# Altium PCB CSD_25.PcbDoc
Units mm, origin at the board's own origin, x right, y up, seen from the top; angles counter-clockwise.
Board outline 92.5 x 90.5 mm, 2 copper layers (Top Layer, Bottom Layer), stack 1.671 mm thick; 24 components, 28 nets, 132 pads, 30 vias.
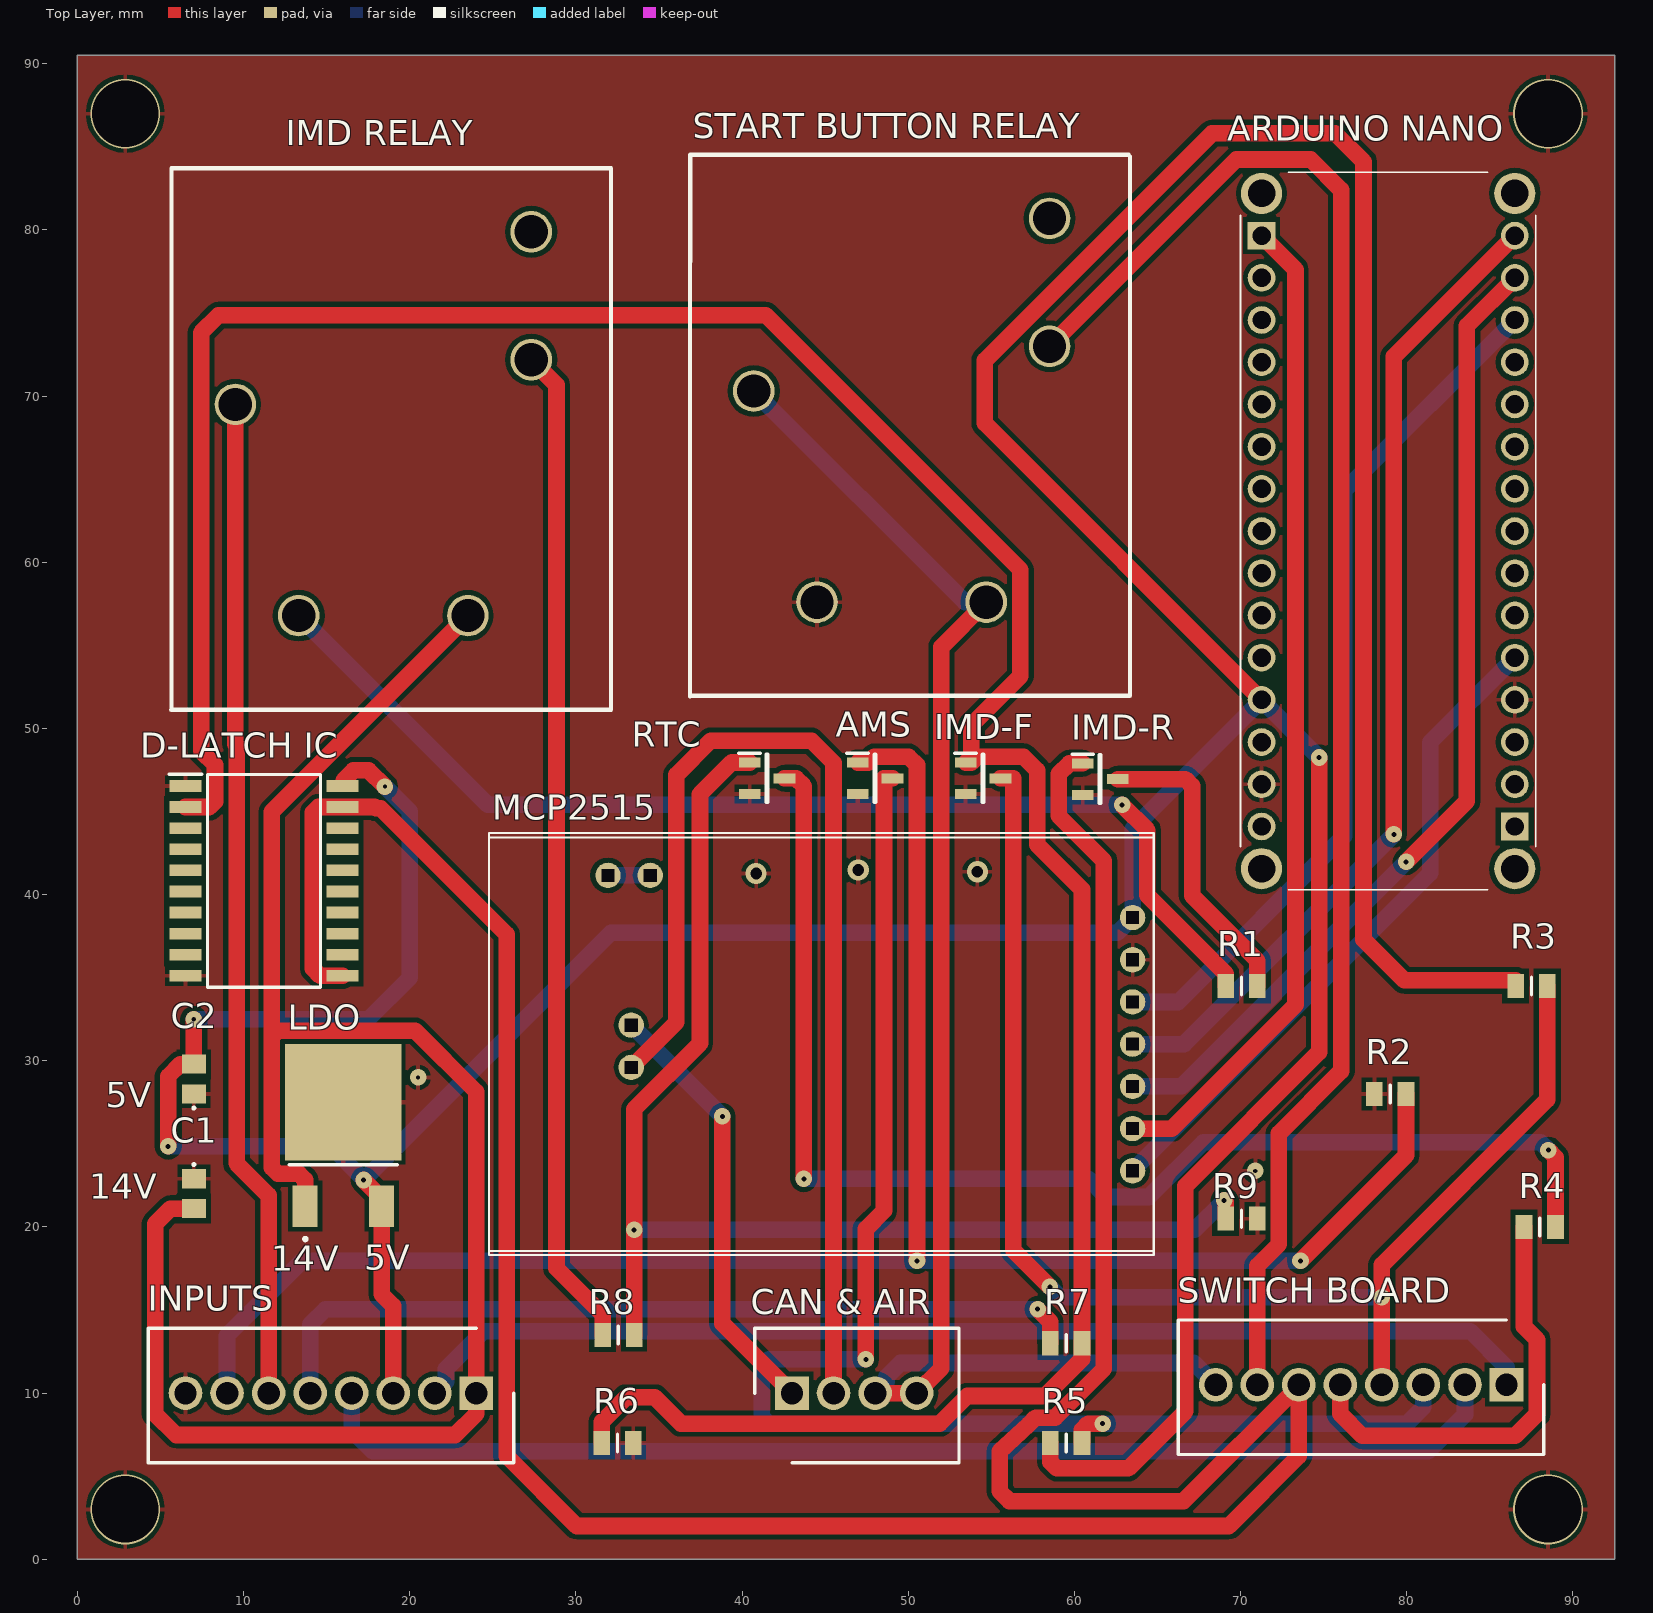
[diagram p0: Top Layer view]
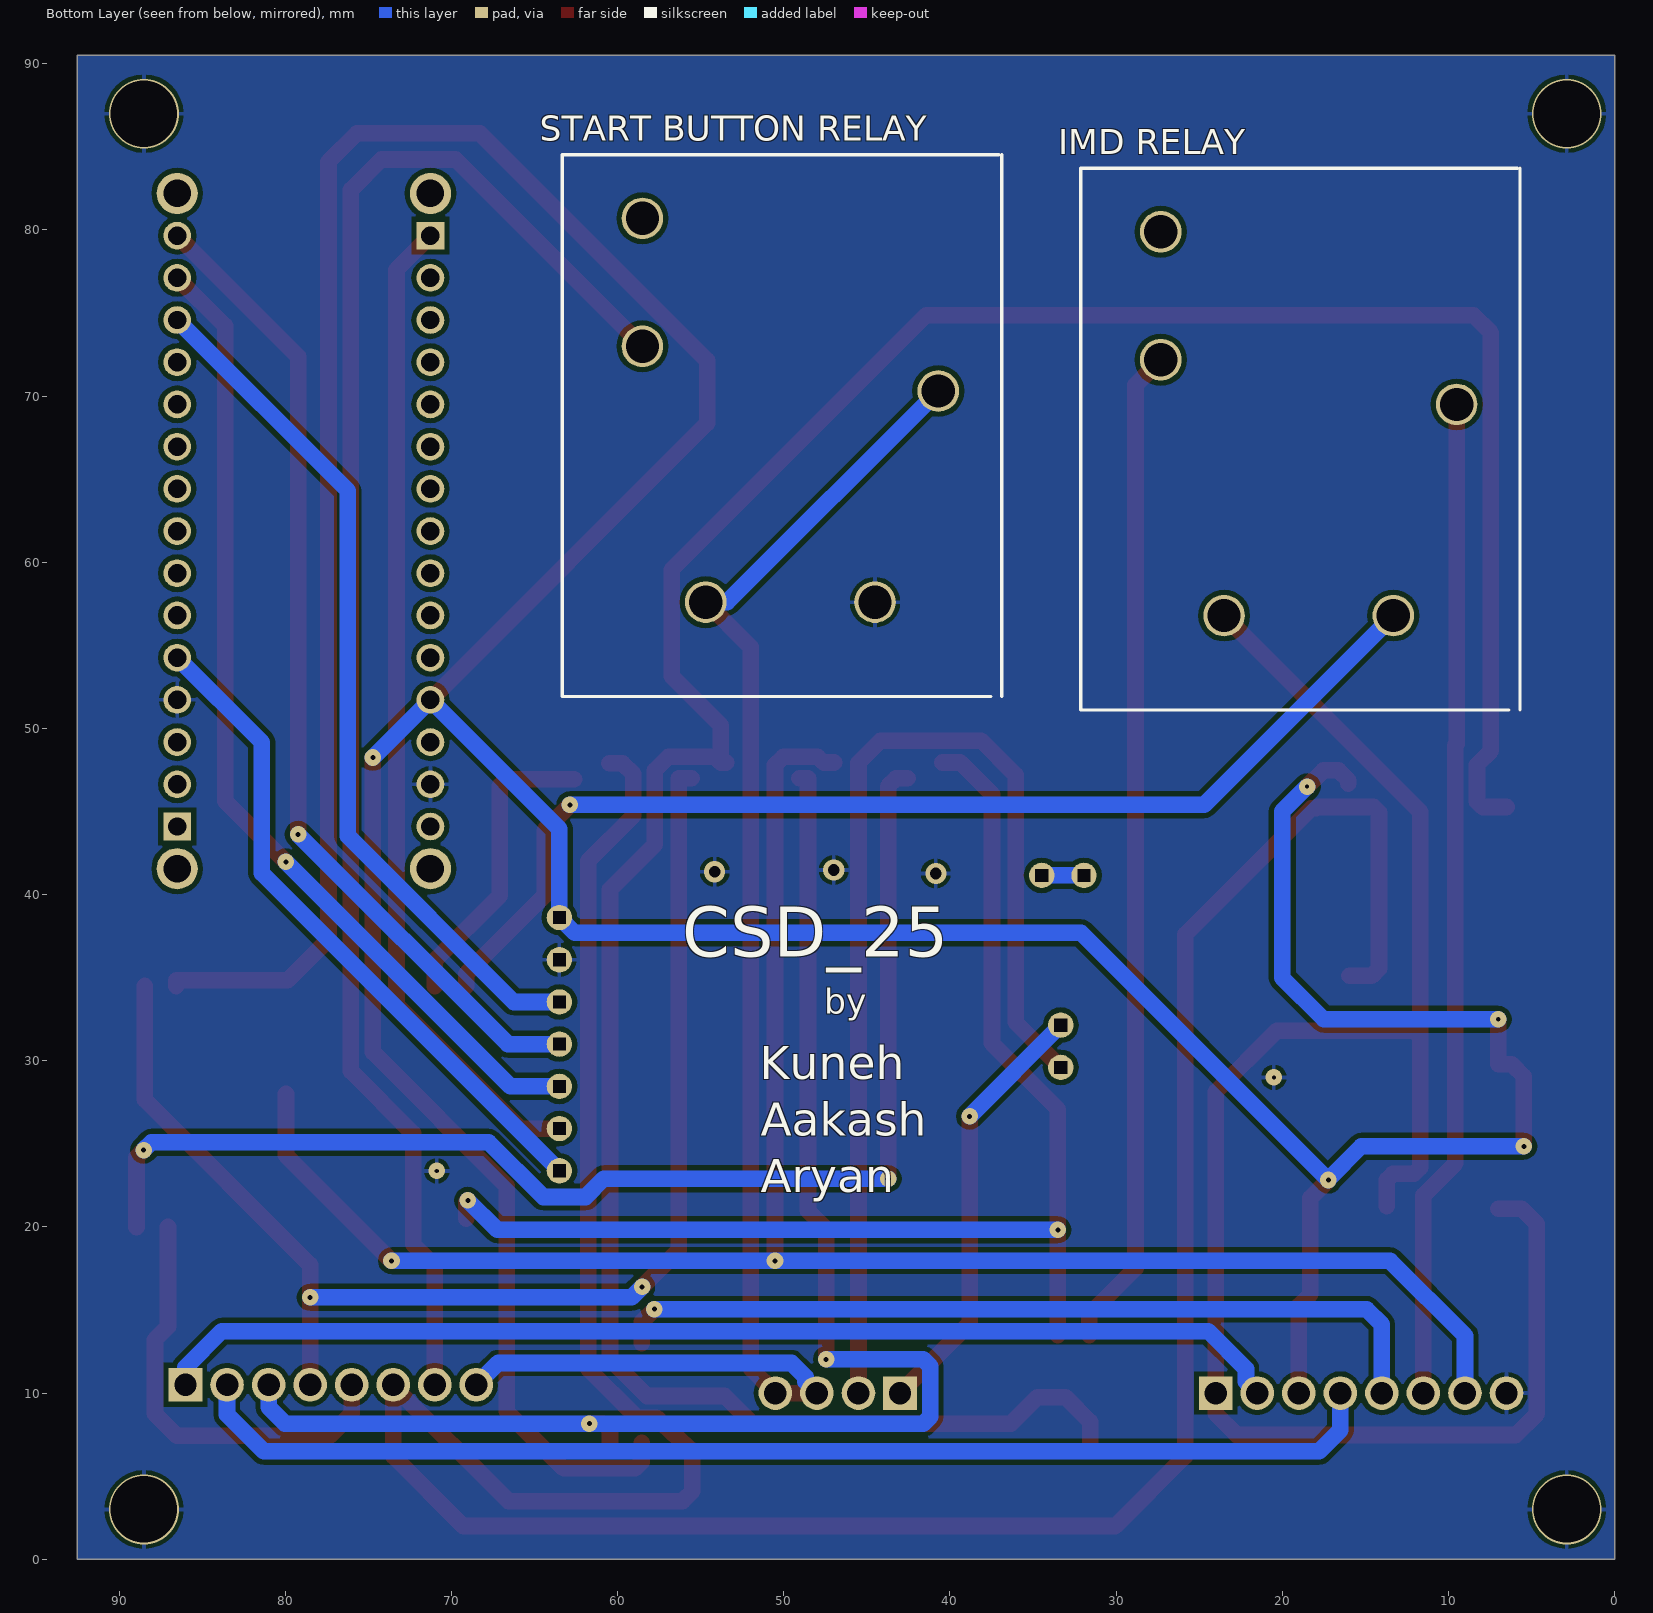
[diagram p1: Bottom Layer view, seen from below]
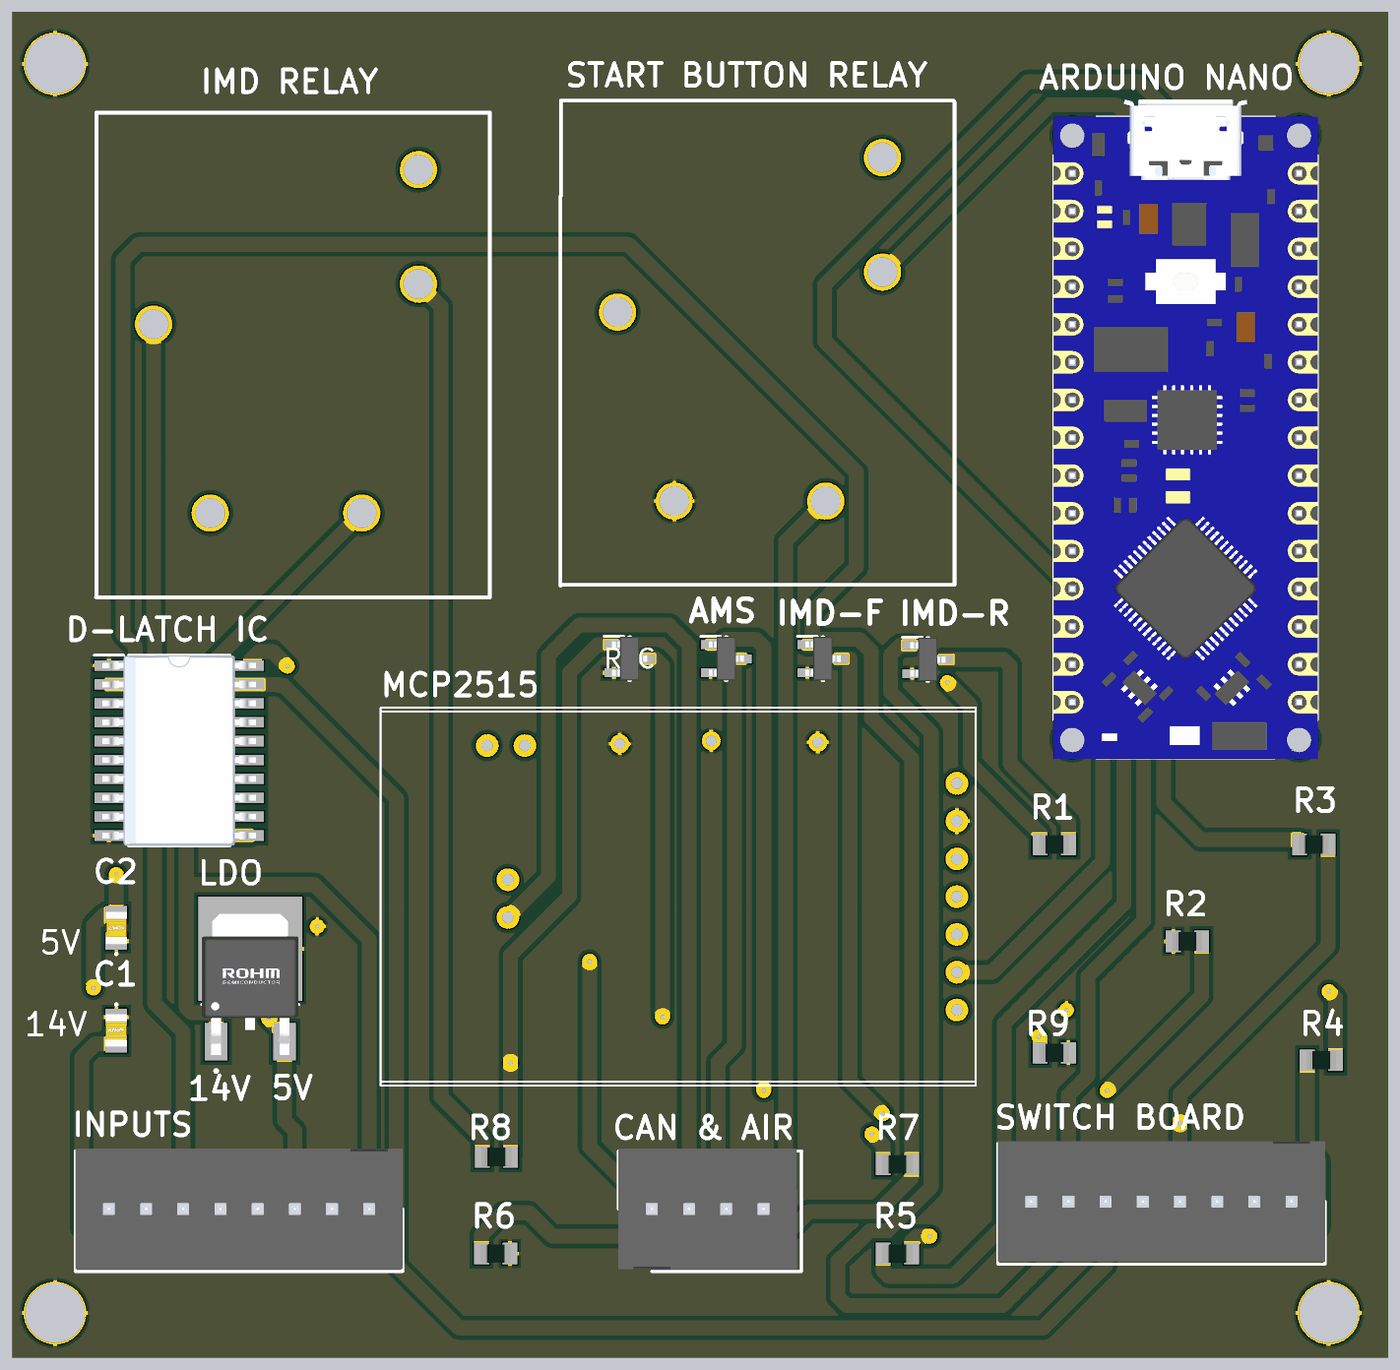
[diagram p2: 3D render of the assembled board from above, using the file's embedded part models]

## Layer stack, top to bottom
Top Solder: solder mask 0.0102, Solder Resist, Dk 3.5
Top Layer: signal copper 0.0356
Dielectric 1: dielectric 1.6, FR-4, Dk 4.8
Bottom Layer: signal copper 0.0356
Bottom Solder: solder mask 0.0102, Solder Resist, Dk 3.5

## Board outline
0,0 92.5,0 92.5,90.5 0,90.5

## Design rules (kind name [scope] priority, off if disabled: settings)
Clearance [All] p1: gap=0.3 ignorepadtopadclearanceinfootprint=FALSE
PolygonConnect [All] p1: connectstyle=Relief reliefconductorwidth=0.254 reliefentries=4 polygonreliefangle="90 Angle" airgapwidth=0.254
RoutingVias [All] p1: holewidth=0.3 width=1 viastyle="Through Hole" minholewidth=0.3 minwidth=1 maxholewidth=0.3 maxwidth=1
SilkToSolderMaskClearance [IsPad] p1: minsilkscreentomaskgap=0.1 clearancetoexposedcopper=TRUE
SolderMaskExpansion [All] p1: expansion=0.102 istentingtop=FALSE
Width [All] p1: maxlimit=1.2 minlimit=0.3 preferedwidth=1
29 further rules are at their usual default settings.

## Components (designator, comment, footprint, x,y, rotation, side; value= is the part's Value field where it differs from the comment)
AMS "2N7002K-T1-GE3" SOT95P237X112-3N 48,47 r0 top
"ARDUINO NANO" "ABX00028" ABX00028 71.26,79.66 r270 top
C1 "C0805C100K5GACTU" C0805 7,22 r270 top
C2 "C0805C100K5GACTU" C0805 7,28.9 r90 top
"CAN & AIR" "691382000004" SHDR4W80P0X250_1X4_1200X810X1010P 43,10 r0 top
"D-LATCH IC" "74HC573D-Q100,118" SOIC127P1032X265-20N 11.225,40.825 r0 top
"IMD RELAY" "BSPD relay" RELAY 23.495,56.792 r90 bottom
IMD-F "2N7002K-T1-GE3" SOT95P237X112-3N 54.5,47 r0 top (schematic designator "IMD F")
IMD-R "2N7002K-T1-GE3" SOT95P237X112-3N 61.55,46.95 r0 top (schematic designator "IMD R")
INPUTS "691382000008" SHDR8W80P0X250_1X8_2200X810X1010P 24,10 r180 top
LDO "BD50C0AFP-CE2" TO-252-3_1 16,29.25 r0 top
MCP2515 "MCP2515" MCP2515_footprint 63.5,31 r180 top
R1 "RC0805JR-0710KL" RESC2012X60N 70.05,34.5 r180 top
R2 "RC0805JR-0710KL" RESC2012X60N 79,28 r0 top
R3 "RC0805JR-0710KL" RESC2012X60N 87.5,34.5 r0 top
R4 "RC0805JR-0710KL" RESC2012X60N 88,20 r0 top
R5 "RC0805JR-0710KL" RESC2012X60N 59.5,7 r0 top
R6 "RC0805JR-0710KL" RESC2012X60N 32.5,7 r180 top
R7 "RC0805JR-0710KL" RESC2012X60N 59.5,13 r180 top
R8 "RC0805JR-0710KL" RESC2012X60N 32.55,13.5 r0 top
R9 "RC0805JR-0710KL" RESC2012X60N 70.05,20.5 r0 top
RTC "2N7002K-T1-GE3" SOT95P237X112-3N 41.5,47 r0 top
"START BUTTON RELAY" "BSPD relay" RELAY 54.69,57.6 r90 bottom
"SWITCH BOARD" "691382000008" SHDR8W80P0X250_1X8_2200X810X1010P 86,10.5 r180 top

## Footprints (in the part's own frame and the unit in brackets; to place one, negate y for a bottom-side part, rotate by r counter-clockwise, add the part's x,y. Pads: shape width x height; smd on the part's side, far side on the other; paste and mask are expansions set on the pad)
ABX00028 [mm]
  rect 1.665x1.665 hole 1.11: A1(0,0) B1(35.56,15.24)
  round 1.665 hole 1.11: A2(2.54,0) A3(5.08,0) A4(7.62,0) A5(10.16,0) A6(12.7,0) A7(15.24,0) A8(17.78,0) A9(20.32,0) A10(22.86,0) A11(25.4,0) A12(27.94,0) A13(30.48,0) A14(33.02,0) A15(35.56,0) B2(33.02,15.24) B3(30.48,15.24) B4(27.94,15.24) B5(25.4,15.24) B6(22.86,15.24) B7(20.32,15.24) B8(17.78,15.24) B9(15.24,15.24) B10(12.7,15.24) B11(10.16,15.24) B12(7.62,15.24) B13(5.08,15.24) B14(2.54,15.24) B15(0,15.24)
  round 2.475 hole 1.65: MH1(-2.54,0) MH2(-2.54,15.24) MH3(38.1,15.24) MH4(38.1,0)
  silkscreen extent -3.81,-1.27 39.37,16.51, body extent -4.94,-1.27 39.39,16.51, height 6
C0805 [mm]
  rect 1.15x1.45 smd: 1(-0.9,0) 2(0.9,0)
  silkscreen extent -1.8,-0.05 -1.7,0.05, body extent -1.1,-0.73 1.1,0.72, height 0.88
MCP2515_footprint [mil] "MCP2515_footprint"
  round 60 hole 30 square: 1(0,300) 2(0,200) 3(0,100) 4(0,0) 5(0,-100) 6(0,-200) 7(0,-300) 8(1243,-400) 9(1143,-400) 10(1188,55) 11(1188,-45)
  silkscreen extent -50,-500 1525,500
RELAY [mm]
  round 2.5 hole 2: GND(0,-10.185) IN(12.708,-13.995) NC(23.099,3.81) NO(15.4,3.81) VCC(0,0)
  silkscreen extent -5.68,-17.81 26.92,8.64
RESC2012X60N [mm]
  rect 1x1.45 smd: 1(-0.95,0) 2(0.95,0)
  silkscreen extent 0,-0.53 0,0.52, body extent -1,-0.63 1,0.63, height 0.5
SHDR4W80P0X250_1X4_1200X810X1010P [mm]
  rect 2.025x2.025 hole 1.35: 1(0,0)
  round 2.025 hole 1.35: 2(2.5,0) 3(5,0) 4(7.5,0)
  silkscreen extent -2.25,-4.2 10.05,3.9, body extent -2.25,-4.05 9.75,4.05, height 10.1
SHDR8W80P0X250_1X8_2200X810X1010P [mm]
  rect 2.025x2.025 hole 1.35: 1(0,0)
  round 2.025 hole 1.35: 2(2.5,0) 3(5,0) 4(7.5,0) 5(10,0) 6(12.5,0) 7(15,0) 8(17.5,0)
  silkscreen extent -2.25,-3.9 19.75,4.2, body extent -2.25,-4.05 19.75,4.05, height 10.1
SOIC127P1032X265-20N [mm]
  rect 1.95x0.7 smd: 1(-4.725,5.715) 2(-4.725,4.445) 3(-4.725,3.175) 4(-4.725,1.905) 5(-4.725,0.635) 6(-4.725,-0.635) 7(-4.725,-1.905) 8(-4.725,-3.175) 9(-4.725,-4.445) 10(-4.725,-5.715) 11(4.725,-5.715) 12(4.725,-4.445) 13(4.725,-3.175) 14(4.725,-1.905) 15(4.725,-0.635) 16(4.725,0.635) 17(4.725,1.905) 18(4.725,3.175) 19(4.725,4.445) 20(4.725,5.715)
  silkscreen extent -5.7,-6.4 3.4,6.42, body extent -5.17,-6.4 5.17,6.4, height 2.54
SOT95P237X112-3N [mm]
  rect 1.3x0.6 smd: 1(-1.05,0.95) 2(-1.05,-0.95) 3(1.05,0)
  silkscreen extent -1.7,-1.46 0.05,1.5, body extent -1.18,-1.46 1.18,1.46, height 1.12
TO-252-3_1 [mm]
  rect 1.5x2.5 smd: 1(-2.3,-8) 2(2.3,-8)
  rect 7x7 smd: 3(0,-1.75)
  silkscreen extent -3.25,-10.07 3.25,-5.5, body extent -3.25,-8.91 3.25,0.59, height 2.6

## Part data
AMS IMD-F IMD-R RTC: "MOSFET (N-Channel)", Manufacturer_Name=Vishay, Mouser Part Number=781-2N7002K-GE3, Arrow Part Number=2N7002K-T1-GE3, Arrow Price/Stock=https://www.arrow.com/en/products/2n7002k-t1-ge3/vishay?region=nac, Datasheet Link=https://www.vishay.com/docs/71333/2n7002k.pdf, Height=1.12mm, Manufacturer_Part_Number=2N7002K-T1-GE3, Mouser Price/Stock=https://www.mouser.co.uk/ProductDetail/Vishay-Semiconductors/2N7002K-T1-GE3?qs=45wPT2wjtGnHy1uvyAq5Mg%3D%3D
"ARDUINO NANO": "Integrated Circuit", Manufacturer_Name=Arduino, Mouser Part Number=782-ABX00028, Arrow Part Number=ABX00028, Arrow Price/Stock=https://www.arrow.com/en/products/abx00028/arduino-corporation?region=nac, Datasheet Link=https://store.arduino.cc/arduino-nano-every, Height=10mm, Manufacturer_Part_Number=ABX00028, Mouser Price/Stock=https://www.mouser.co.uk/ProductDetail/Arduino/ABX00028?qs=PzGy0jfpSMtit6rnFl8mVg%3D%3D
C1 C2: "Capacitor", Manufacturer_Name=KEMET, Mouser Part Number=80-C0805C100K5G, Arrow Part Number=C0805C100K5GACTU, Arrow Price/Stock=https://www.arrow.com/en/products/c0805c100k5gactu/kemet-corporation, Datasheet Link=https://content.kemet.com/datasheets/KEM_C1003_C0G_SMD.pdf, Height=1.1mm, Manufacturer_Part_Number=C0805C100K5GACTU, Mouser Price/Stock=https://www.mouser.co.uk/ProductDetail/KEMET/C0805C100K5GACTU?qs=3SD0MEbi8oiSMc603vV8xA%3D%3D
"CAN & AIR": "Connector", Manufacturer_Name="Wurth Elektronik", Mouser Part Number=710-691382000004, Datasheet Link=http://katalog.we-online.de/em/datasheet/6913820000xx.pdf, Height=10.1mm, Manufacturer_Part_Number=691382000004, Mouser Price/Stock=https://www.mouser.co.uk/ProductDetail/Wurth-Elektronik/691382000004?qs=a9WhcLg8qCyFbLIGoZKy%252Bg%3D%3D
"D-LATCH IC": "Integrated Circuit", Manufacturer_Name=Nexperia, Mouser Part Number=771-74HC573D-Q100118, Arrow Part Number=74HC573D-Q100,118, Arrow Price/Stock=https://www.arrow.com/en/products/74hc573d-q100118/nexperia?region=nac, Datasheet Link=https://assets.nexperia.com/documents/data-sheet/74HC_HCT573_Q100.pdf, Height=2.65mm, Manufacturer_Part_Number=74HC573D-Q100,118, Mouser Price/Stock=https://www.mouser.co.uk/ProductDetail/Nexperia/74HC573D-Q100118?qs=1sbE9T7hb3btCWmlkzpPjQ%3D%3D
"IMD RELAY" "START BUTTON RELAY": library part leone_relay
INPUTS "SWITCH BOARD": "Connector", Manufacturer_Name="Wurth Elektronik", Mouser Part Number=710-691382000008, Datasheet Link=http://katalog.we-online.de/em/datasheet/6913820000xx.pdf, Height=10.1mm, Manufacturer_Part_Number=691382000008, Mouser Price/Stock=https://www.mouser.co.uk/ProductDetail/Wurth-Elektronik/691382000008?qs=a9WhcLg8qCyuKMyFRlGfoA%3D%3D
LDO: "Integrated Circuit", Manufacturer_Name="ROHM Semiconductor", Mouser Part Number=755-BD50C0AFP-CE2, Datasheet Link=https://datasheet.datasheetarchive.com/originals/distributors/DKDS-10/186392.pdf, Manufacturer_Part_Number=BD50C0AFP-CE2, Mouser Price/Stock=https://www.mouser.co.uk/ProductDetail/ROHM-Semiconductor/BD50C0AFP-CE2?qs=WHeKGGBt0W9eizcry0Olog%3D%3D
R1 R2 R3 R4 R5 R6 R7 R8 R9: "Resistor", Manufacturer_Name=KEMET, Mouser Part Number=603-RC0805JR-0710KL, Arrow Part Number=RC0805JR-0710KL, Arrow Price/Stock=https://www.arrow.com/en/products/rc0805jr-0710kl/yageo, Datasheet Link=http://www.yageo.com/documents/recent/PYu-RC_Group_51_RoHS_L_10.pdf, Height=0.6mm, Manufacturer_Part_Number=RC0805JR-0710KL, Mouser Price/Stock=https://www.mouser.co.uk/ProductDetail/YAGEO/RC0805JR-0710KL?qs=ZFGQJeMQzF5q%2Fp77vM%2FrVQ%3D%3D

## Via types
v1: diameter 1, hole 0.3, Top Layer to Bottom Layer, 19 vias
v2: diameter 1, hole 0.254, Top Layer to Bottom Layer, 4 vias
v3: diameter 4.2, hole 4, Top Layer to Bottom Layer, 4 vias
v4: diameter 1.27, hole 0.711, Top Layer to Bottom Layer, 3 vias

## Nets (pads, with @x,y where several pads share a name; then routed paths per layer and width w, separated by ;. In a path a pad name is that pad's centre, name@x,y a point inside that pad or via, vN(x,y) a via of type N, cw(c..) or ccw(c..) an arc to the next point about the centre after c; other vN are vias at no path point)
1A: "D-LATCH IC.2" IMD-F.1 R6.2 R7.1 | length 173.7
  Top Layer w1: 6.5,45.27 7.938,45.27 8.275,45.608 8.275,47.815 7.442,48.648 7.442,73.825 8.484,74.866 41.427,74.866 56.744,59.55 56.744,53.149 53.797,50.203 IMD-F.1@53.797,47.95 ; R6.2 31.55,8.271 33.02,9.741 34.747,9.741 36.322,8.166 51.891,8.166 53.55,9.825 58.223,9.825 60.45,12.052 R7.1 60.45,40.311 57.75,43.011 57.75,47.485 56.935,48.3 54.147,48.3 IMD-F.1@53.797,47.95 ; IMD-F.1 IMD-F.1@53.797,47.95
5V: "ARDUINO NANO.A12" "D-LATCH IC.20" C2.2 INPUTS.3 LDO.2 MCP2515.7 R3.1 R5.1 | length 307.3
  Top Layer w1: v1(5.461,24.854) 5.461,29.07 6.191,29.8 C2.2 v2(7,32.5) ; 16.021,46.69 16.021,46.893 16.607,47.479 17.521,47.479 v2(18.5,46.5) ; v1(17.221,22.822) LDO.2@18.3,21.743 ; v1(17.227,22.828) 18.3,21.755 LDO.2@18.3,21.743 ; INPUTS.3 19,15.252 18.3,15.952 LDO.2 LDO.2@18.3,21.743 ; R5.1 58.55,5.854 58.931,5.473 63.246,5.473 66.675,8.902 66.675,22.466 74.727,30.518 v1(74.727,48.253) ; 71.26,51.72 54.61,68.37 54.61,72.148 68.275,85.814 75.692,85.814 77.394,84.112 77.394,37.3 79.858,34.836 86.55,34.836 R3.1
  Bottom Layer w1: v1(5.461,24.854) 15.24,24.854 17.221,22.872 v1(17.221,22.822) ; v2(7,32.5) 17.5,32.5 20,35 20,45 v2(18.5,46.5) ; v1(17.227,22.828) 32.105,37.706 62.586,37.706 MCP2515.7 63.5,43.96 71.26,51.72 v1(74.727,48.253)
14V: "IMD RELAY.VCC" C1.2 INPUTS.1 LDO.1 | length 109.9
  Top Layer w1: C1.2 5.594,21.1 4.674,20.18 4.674,8.75 5.944,7.48 22.73,7.48 24,8.75 INPUTS.1 24,28.133 20.32,31.813 12.065,31.813 11.7,31.448 ; LDO.1 13.7,22.835 13.335,23.2 12.065,23.2 11.7,23.565 11.7,31.448 ; 23.495,56.792 11.7,44.997 11.7,31.448
"AMS LED": "SWITCH BOARD.3" AMS.3 R5.2 | length 89.4
  Top Layer w1: v1(47.447,12.027) 47.447,19.884 48.539,20.977 48.539,47 AMS.3 ; R5.2 60.45,7.798 60.818,8.166 v1(61.697,8.166)
  Bottom Layer w1: v1(47.447,12.027) 41.593,12.027 41.173,11.608 41.173,8.585 41.593,8.166 v1(61.697,8.166) 80.01,8.166 81,9.156 81,10.5
AMS_5V: AMS.1 INPUTS.7 R2.2 | length 116.4
  Top Layer w1: AMS.1 47.6,47.95 47.95,48.3 50.023,48.3 50.521,47.803 v1(50.521,17.958) ; v1(73.6,17.958) 79.95,24.307 R2.2
  Bottom Layer w1: INPUTS.7 9,13.457 13.5,17.958 v1(50.521,17.958) v1(73.6,17.958)
AMS_14V: "IMD RELAY.IN" INPUTS.6 | length 60.3
  Top Layer w1: 9.5,69.5 9.5,49.065 9.575,48.99 9.575,23.825 11.5,21.9 INPUTS.6
"AUX +": "SWITCH BOARD.1" INPUTS.2 | length 68.5
  Bottom Layer w1: INPUTS.2 22.174,10.674 22.174,11.455 24.447,13.728 83.82,13.728 86,11.548 86,10.5
"AUX -": "SWITCH BOARD.2" INPUTS.4 | length 72.5
  Bottom Layer w1: INPUTS.4 16.5,7.769 17.78,6.489 81.28,6.489 83.5,8.709 83.5,10.5
CAN-H: "CAN & AIR.2" MCP2515.10 | length 67.5
  Top Layer w1: MCP2515.10 36.043,32.321 36.043,47.206 38.1,49.263 44.171,49.263 45.5,47.934 45.5,10
CAN-L: "CAN & AIR.1" MCP2515.11 | length 26.2
  Top Layer w1: v1(38.811,26.657) 38.811,14.189 43,10
  Bottom Layer w1: MCP2515.11 v1(38.811,26.657)
CS: "ARDUINO NANO.B13" MCP2515.5 | length 52.2
  Bottom Layer w1: MCP2515.5 66.243,33.54 76.228,43.525 76.228,64.308 86.5,74.58
GND: "ARDUINO NANO.A14" "ARDUINO NANO.B4" "D-LATCH IC.1" "D-LATCH IC.10" "START BUTTON RELAY.GND" AMS.2 C1.1 C2.1 IMD-F.2 IMD-R.2 INPUTS.8 LDO.3 MCP2515.6 R2.1 R6.1 R9.2 RTC.2
  other v2: 70.873,23.373 20.5,29
  other v3: 2.873,3 88.5,3 2.873,87 88.5,87
  other v4: 40.843,41.275 54.153,41.377 46.99,41.478
"IMD LED": "SWITCH BOARD.4" IMD-F.3 R3.2 | length 80.6
  Top Layer w1: IMD-F.3 56.312,47 56.312,18.605 v1(58.522,16.395) ; 78.5,10.5 v1(78.5,15.76) 78.5,17.714 88.45,27.664 R3.2
  Bottom Layer w1: v1(58.522,16.395) 59.157,15.76 v1(78.5,15.76)
"IMD RELAY 14 V": "IMD RELAY.NO" R8.1 | length 60.5
  Top Layer w1: 27.305,72.192 28.829,70.669 28.829,17.515 31.6,14.744 R8.1
IMD_14V: INPUTS.5 R7.2 | length 50.7
  Top Layer w1: v1(57.785,15.049) 58.55,14.284 R7.2
  Bottom Layer w1: INPUTS.5 14,14.135 14.914,15.049 v1(57.785,15.049)
INT: "ARDUINO NANO.B5" MCP2515.1 | length 40.4
  Bottom Layer w1: MCP2515.1 81.407,41.287 81.407,49.167 86.5,54.26
MISO: "ARDUINO NANO.B15" MCP2515.4 | length 60
  Top Layer w1: v1(79.223,43.624) 79.223,72.383 86.5,79.66
  Bottom Layer w1: MCP2515.4 66.598,31 v1(79.223,43.624)
MOSI: "ARDUINO NANO.B14" MCP2515.3 | length 59.9
  Top Layer w1: v1(79.959,41.973) 83.617,45.631 83.617,74.237 86.5,77.12
  Bottom Layer w1: MCP2515.3 66.446,28.46 v1(79.959,41.973)
NetMCP2515_18: MCP2515.8 MCP2515.9 | length 2.5
  Bottom Layer w1: MCP2515.8 MCP2515.9
NetR4_2: R4.2 RTC.3 | length 76.6
  Top Layer w1: RTC.3 43.246,47 43.713,46.533 v1(43.713,22.898) ; v1(88.519,24.625) 88.95,24.194 R4.2
  Bottom Layer w1: v1(43.713,22.898) 60.833,22.898 61.925,21.806 64.465,21.806 67.755,25.095 88.049,25.095 v1(88.519,24.625)
"Ready To Charge LED": "SWITCH BOARD.5" R4.1 | length 26.3
  Top Layer w1: 76,10.5 76,8.75 77.321,7.429 86.512,7.429 87.833,8.75 87.833,13.22 87.05,14.004 R4.1
"RESET BUTTON 1": "D-LATCH IC.11" "D-LATCH IC.19" "SWITCH BOARD.6" IMD-R.1 | length 183.6
  Top Layer w1: 15.95,35.11 14.605,35.11 14.173,35.542 14.173,44.945 14.498,45.27 15.95,45.27 17.892,45.27 17.962,45.2 18.236,45.2 25.832,37.604 25.832,6.21 30.042,2 69.29,2 73.5,6.21 73.5,10.437 ; IMD-R.1 59.69,47.9 59.05,47.26 59.05,44.747 61.773,42.024 61.773,11.465 58.832,8.525 57.66,8.525 57.25,8.115 55.5,6.5 55.5,4.086 56.086,3.5 66.563,3.5 73.5,10.437 ; 73.5,10.5 73.5,10.437
SCK: "ARDUINO NANO.A1" MCP2515.2 | length 60
  Top Layer w1: MCP2515.2 65.862,25.92 73.304,33.363 73.304,77.616 71.26,79.66
"START BUTTON 1": "START BUTTON RELAY.NO" "SWITCH BOARD.7" | length 97
  Top Layer w1: 58.5,73 69.739,84.239 74.219,84.239 76.048,82.41 76.048,29.375 72.3,25.627 72.3,18.961 71,17.661 71,10.5
"START BUTTON 2": "CAN & AIR.3" "CAN & AIR.4" "START BUTTON RELAY.IN" "START BUTTON RELAY.VCC" "SWITCH BOARD.8" | length 93.1
  Top Layer w1: 48,10 50.5,10 51.994,11.494 51.994,54.904 54.69,57.6
  Bottom Layer w1: 40.695,70.308 53.402,57.6 54.69,57.6 ; 48,10 48.687,10.687 48.687,10.97 49.53,11.813 67.187,11.813 68.5,10.5
X1: IMD-R.3 R1.1 | length 18.3
  Top Layer w1: IMD-R.3 66.675,46.95 67.081,46.544 67.081,39.948 71,36.03 R1.1
X2: "IMD RELAY.GND" R1.2 | length 67.8
  Top Layer w1: v1(62.865,45.402) 64.389,43.878 64.389,39.953 69.1,35.242 R1.2
  Bottom Layer w1: 13.31,56.792 24.7,45.402 v1(62.865,45.402)
X3: R8.2 R9.1 RTC.1 | length 75.3
  Top Layer w1: R8.2 v1(33.5,19.824) 33.5,27.086 37.465,31.051 37.465,46.045 39.37,47.95 RTC.1 ; v1(69.012,21.602) 69.1,21.514 R9.1
  Bottom Layer w1: v1(33.5,19.824) 67.234,19.824 v1(69.012,21.602)
pads on no net: "ARDUINO NANO.A2" "ARDUINO NANO.A3" "ARDUINO NANO.A4" "ARDUINO NANO.A5" "ARDUINO NANO.A6" "ARDUINO NANO.A7" "ARDUINO NANO.A8" "ARDUINO NANO.A9" "ARDUINO NANO.A10" "ARDUINO NANO.A11" "ARDUINO NANO.A13" "ARDUINO NANO.A15" "ARDUINO NANO.B1" "ARDUINO NANO.B2" "ARDUINO NANO.B3" "ARDUINO NANO.B6" "ARDUINO NANO.B7" "ARDUINO NANO.B8" "ARDUINO NANO.B9" "ARDUINO NANO.B10" "ARDUINO NANO.B11" "ARDUINO NANO.B12" "ARDUINO NANO.MH1" "ARDUINO NANO.MH2" "ARDUINO NANO.MH3" "ARDUINO NANO.MH4" "D-LATCH IC.3" "D-LATCH IC.4" "D-LATCH IC.5" "D-LATCH IC.6" "D-LATCH IC.7" "D-LATCH IC.8" "D-LATCH IC.9" "D-LATCH IC.12" "D-LATCH IC.13" "D-LATCH IC.14" "D-LATCH IC.15" "D-LATCH IC.16" "D-LATCH IC.17" "D-LATCH IC.18" "IMD RELAY.NC" "START BUTTON RELAY.NC"

## Polygon pours and split planes (outlines as drawn)
GND on Bottom Layer "GND_L02_P001" (solid, pour order 1): 0,90.5 92.5,90.5 92.5,0 0,0
GND on Top Layer "GND_L01_P000" (solid, pour order 0): 0,90.5 92.5,90.5 92.5,0 0,0

## Silkscreen, mask and mechanical layers (free items; w line width, h text height)
Top Overlay:
  lines w0.254: 5.639,51.13 5.664,51.156 5.664,83.718 16.332,83.718 32.106,83.718 32.106,51.13 5.639,51.13 ; 36.855,51.918 36.906,51.968 63.322,51.968 63.348,51.994 63.348,84.43 63.246,84.531 36.881,84.531 36.881,78.105 36.855,78.08 36.855,51.918
  text "START BUTTON RELAY" at 37.033,85.522 h1.52
  text "IMD RELAY" at 12.522,85.09 h1.52
  text "5V" at 1.7,27.2 h1.52
  text "14V" at 0.7,21.7 h1.52
  text "5V" at 17.272,17.424 h1.52
  text "14V" at 11.659,17.374 h1.52
Bottom Overlay:
  text "CSD_25" at 56.091,36.255 h3
  text "by" at 47.549,32.842 h1.52
  text "Kuneh" at 51.44,28.9 h2
  text "Aakash" at 51.389,25.497 h2
  text "Aryan" at 51.389,22.099 h2